# EAGLE board PCB 3.0.0 (EAGLE 6.5.0)
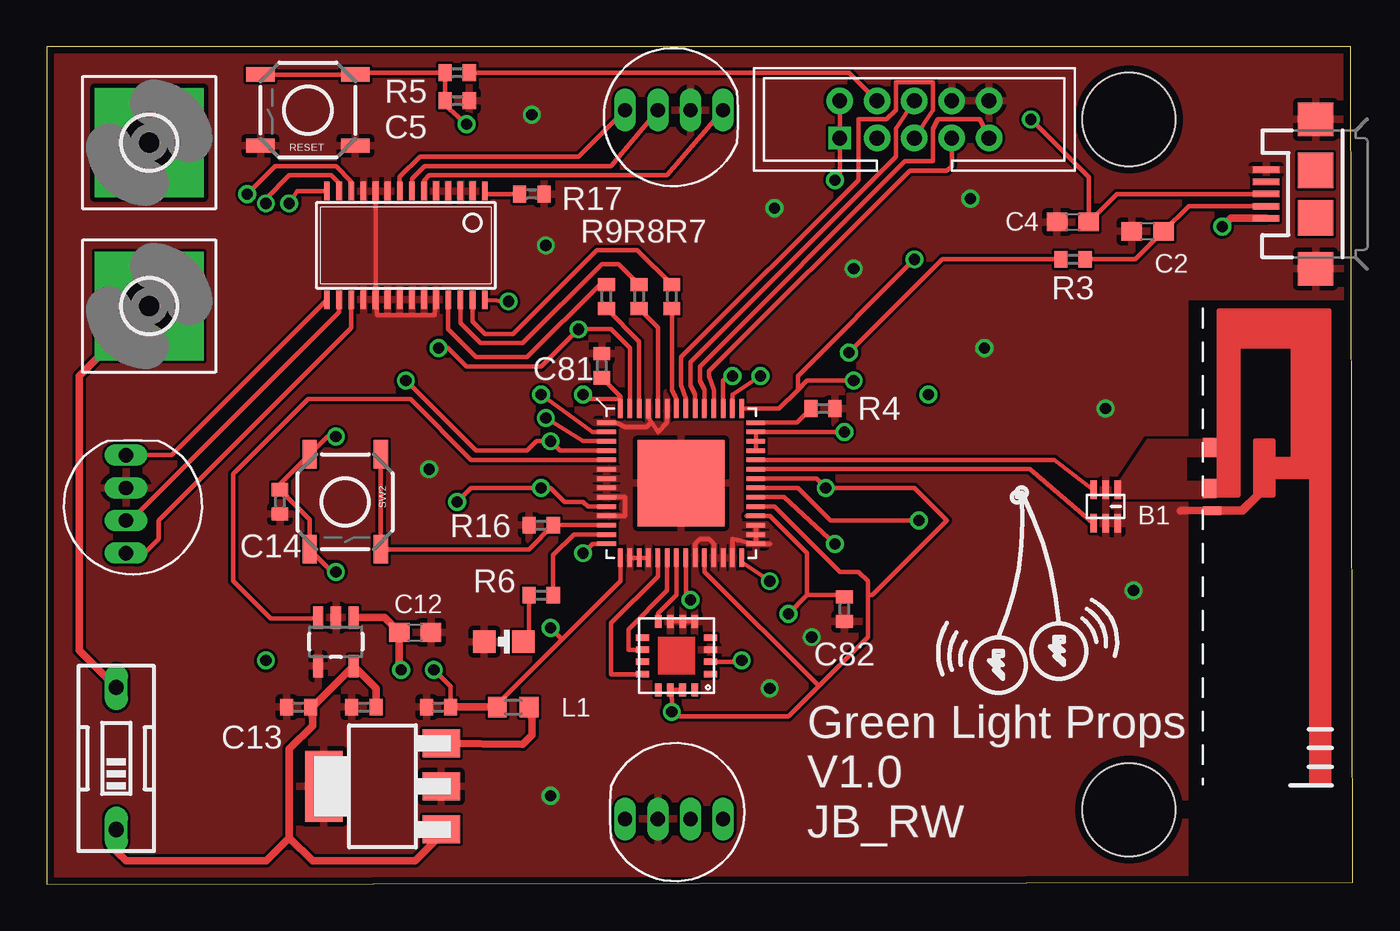
[diagram p0: board, top side]
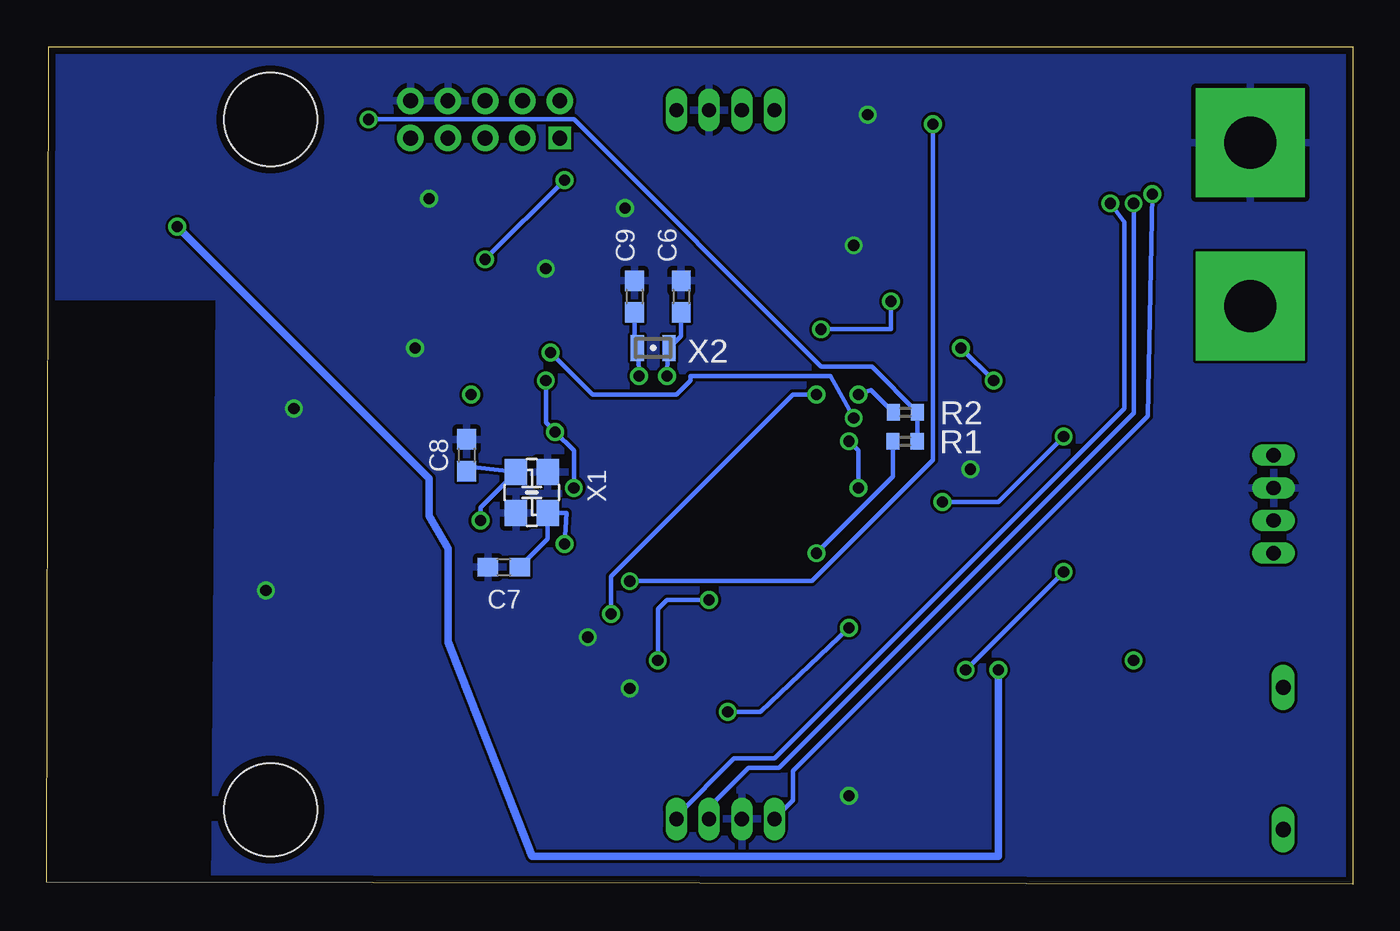
[diagram p1: board, bottom side, seen from below]

Size 70 x 44.9 mm. Coordinates in mm from the lower left corner, seen from the top.
Outline: 0,0 70,0.1 69.9,44.9 0,44.9 0,0
Copper layers (1*16): Top 0.0356mm / dielectric 1.5011mm / Bottom 0.0356mm
Design rules "LaenPCBOrder": minimum track width 6mil, minimum drill 13mil, track to track 6mil, track to pad 6mil, pad to pad 6mil, via to via 6mil, smd to smd 6mil, copper to edge 15mil, drill to drill 6mil, minimum pad ring 7mil, minimum via ring 7mil, stop-mask expansion 3mil, vias tented up to drill 0mil, thermal gap 10mil
Net classes: 0 default: width 0.152 mm, drill 0.305 mm, clearance 0.152 mm; 1 RF: width 0.152 mm, clearance 0.152 mm
Holes 5 mm at 58,4 58,41

## Footprints (pad centres in the part's own frame; a part is rotated, then mirrored left to right if it is on the bottom)
BALUN-0805 = smd 1 x 0.35: 1 -0.9,0.65; 2 -0.9,0; 3 -0.9,-0.65; 4 0.9,-0.65; 5 0.9,0; 6 0.9,0.65
C0402 = smd 0.7 x 0.9: 1 -0.65,0; 2 0.65,0
C0603 = smd 1.1 x 1: 1 -0.85,0; 2 0.85,0
LED-RGB-THRU = drill 0.762 pad 0.889 long: 1 1.75,0; 2 0,0; 3 -1.75,0; 4 -3.5,0
2,8-PAD-SQUARE = drill 2.8 pad 5.842 square: B2,8 0,0
USB-MICROB = smd 0.35 x 1.4: D+ 0,2.65; D- -0.65,2.65; GND 1.3,2.65; ID 0.65,2.65; VBUS -1.3,2.65 | smd 1.8 x 1.9: MT1 -4,0; MT2 4,0 | smd 1.9 x 1.9: P$1 -1.27,0; P$2 1.27,0
HDR-2X5-2.00 = drill 0.8 square: 1 -4,-1 | drill 0.8 pad 1.422: 2 -4,1; 3 -2,-1; 4 -2,1; 5 0,-1; 6 0,1; 7 2,-1; 8 2,1; 9 4,-1; 10 4,1
R603 = smd 1 x 1.1: 1 -0.85,0; 2 0.85,0
LED-805 = smd 1.2 x 1.2: A 0,-1.05; C 0,1.05
R0402 = smd 0.7 x 0.9: 1 -0.65,0; 2 0.65,0
TACTILE_SWITCH_SMD = smd 1.524 x 0.762: 1 -2.54,1.905; 2 2.54,1.905; 3 -2.54,-1.905; 4 2.54,-1.905
DIPSWITCH = drill 0.813 long: 1 -1.27,-3.81; 4 -1.27,3.81
QFN56 = smd 1 x 0.24: 1 -4,3.25; 2 -4,2.75; 3 -4,2.25; 4 -4,1.75; 5 -4,1.25; 6 -4,0.75; 7 -4,0.25; 8 -4,-0.25; 9 -4,-0.75; 10 -4,-1.25; 11 -4,-1.75; 12 -4,-2.25; 13 -4,-2.75; 14 -4,-3.25; 29 4,-3.25; 30 4,-2.75; 31 4,-2.25; 32 4,-1.75; 33 4,-1.25; 34 4,-0.75; 35 4,-0.25; 36 4,0.25; 37 4,0.75; 38 4,1.25; 39 4,1.75; 40 4,2.25; 41 4,2.75; 42 4,3.25 | smd 0.24 x 1: 15 -3.25,-4; 16 -2.75,-4; 17 -2.25,-4; 18 -1.75,-4; 19 -1.25,-4; 20 -0.75,-4; 21 -0.25,-4; 22 0.25,-4; 23 0.75,-4; 24 1.25,-4; 25 1.75,-4; 26 2.25,-4; 27 2.75,-4; 28 3.25,-4; 43 3.25,4; 44 2.75,4; 45 2.25,4; 46 1.75,4; 47 1.25,4; 48 0.75,4; 49 0.25,4; 50 -0.25,4; 51 -0.75,4; 52 -1.25,4; 53 -1.75,4; 54 -2.25,4; 55 -2.75,4; 56 -3.25,4 | smd 4.65 x 4.65: PAD 0,0
SOT23-5 = smd 0.55 x 1.2: 1 -0.95,-1.3; 2 0,-1.3; 3 0.95,-1.3; 4 0.95,1.3; 5 -0.95,1.3
DN007+0 = smd 0.46 x 1: FEED 2.22,-2.8 | smd 1.01 x 0.74: GND -1.16,-2.93; GND@1 1.035,-2.93
TSSOP28 = smd 0.305 x 0.991: 1 -4.225,-2.918; 2 -3.575,-2.918; 3 -2.925,-2.918; 4 -2.275,-2.918; 5 -1.625,-2.918; 6 -0.975,-2.918; 7 -0.325,-2.918; 8 0.325,-2.918; 9 0.975,-2.918; 10 1.625,-2.918; 11 2.275,-2.918; 12 2.925,-2.918; 13 3.575,-2.918; 14 4.225,-2.918; 15 4.225,2.918; 16 3.575,2.918; 17 2.925,2.918; 18 2.275,2.918; 19 1.625,2.918; 20 0.975,2.918; 21 0.325,2.918; 22 -0.325,2.918; 23 -0.975,2.918; 24 -1.625,2.918; 25 -2.275,2.918; 26 -2.925,2.918; 27 -3.575,2.918; 28 -4.225,2.918
16LCSP = smd 0.7 x 0.35: 1 -1.825,0.975; 2 -1.825,0.325; 3 -1.825,-0.325; 4 -1.825,-0.975; 9 1.825,-0.975; 10 1.825,-0.325; 11 1.825,0.325; 12 1.825,0.975 | smd 0.35 x 0.7: 5 -0.975,-1.85; 6 -0.35,-1.85; 7 0.325,-1.85; 8 0.975,-1.85; 13 0.975,1.825; 14 0.325,1.825; 15 -0.325,1.825; 16 -0.975,1.825
SOT223 = smd 1.5 x 2: 1 -2.3,-3.15; 2 0,-3.15; 3 2.3,-3.15 | smd 3.8 x 2: 4 0,3.15
XTAL-4-3225 = smd 1.4 x 1.2: 1 -1.1,-0.85; 2 1.1,-0.85; 3 1.1,0.85; 4 -1.1,0.85
FC-12M = smd 0.7 x 1.4: 1 -0.85,0; 2 0.85,0

## Placement (x,y rotation side)
B1  BALUN  [BALUN-0805]  56.75,20.25 270 top
C1  0u1  [C0402]  17,9.5 180 top
C2  47p  [C0603]  59,35 0 top
C3  0u1  [C0402]  21,9.5 0 top
C4  47p  [C0603]  55,35.5 0 top
C5  0.1u  [C0402]  22,42 180 top
C6  47p  [C0603]  36,31.5 270 bottom
C7  47p  [C0603]  45.5,17 0 bottom
C8  47p  [C0603]  47.5,23 270 bottom
C9  47p  [C0603]  38.5,31.5 270 bottom
C12  47p  [C0603]  19.75,13.5 0 top
C13  0u1  [C0402]  13.5,9.5 0 top
C14  0u1  [C0402]  12.5,20.5 270 top
C81  1u  [C0402]  29.75,27.8 270 top
C82  1u  [C0402]  42.75,14.75 90 top
D1  LED-RGB-CC-THRUDIFFUSE  [LED-RGB-THRU]  4.25,21.25 90 top
D2  LED-RGB-CC-THRUDIFFUSE  [LED-RGB-THRU]  32.75,3.5 180 top
D3  LED-RGB-CC-THRUDIFFUSE  [LED-RGB-THRU]  34.5,41.5 0 top
H1  MOUNT-PAD-SQUARE2.8  [2,8-PAD-SQUARE]  5.5,31 0 top
H2  MOUNT-PAD-SQUARE2.8  [2,8-PAD-SQUARE]  5.5,39.75 0 top
JP1  USB-MICROB  [USB-MICROB]  68,37 90 top
JTAG  JTAG10  [HDR-2X5-2.00]  46.5,41 0 top
L1  [R603]  25,9.5 180 top
LED2  [LED-805]  24.5,13 90 top
R1  1k5  [R0402]  24,23.75 180 bottom
R2  33  [R0402]  23.98,25.3 180 bottom
R3  33  [R0402]  55,33.5 180 top
R4  56k  [R0402]  41.6,25.5 0 top
R5  2k2  [R0402]  22,43.5 0 top
R6  470  [R0402]  26.5,15.5 0 top
R7  1.8k  [R0402]  33.5,31.5 270 top
R8  1.8k  [R0402]  31.75,31.5 270 top
R9  1.8k  [R0402]  30,31.5 270 top
R16  10k  [R0402]  26.5,19.25 180 top
R17  442  [R0402]  26,37 0 top
RESET  [TACTILE_SWITCH_SMD]  14,41.5 180 top
SW1  [DIPSWITCH]  5,6.75 0 top
SW2  [TACTILE_SWITCH_SMD]  16,20.5 270 top
U1  CC2538  [QFN56]  34,21.5 0 top
U2  MAX1555  [SOT23-5]  15.5,13 180 top
U$2  INVERTED_F_ANTENNA+0  [DN007+0]  65.25,22.25 270 top
U$3  TLC59116  [TSSOP28]  19.25,34.25 180 top
U$4  ADXL33X  [16LCSP]  33.75,12.25 180 top
VREG1  LM3940IMP  [SOT223]  18,5.25 90 top
X1  32MHz  [XTAL-4-3225]  44,21 90 bottom
X2  FC-12M  [FC-12M]  37.5,28.75 180 bottom

## Library data of the parts
B1 C1-C9 C12-C14 C81 C82 L1 LED2 X1 = discrete
D1-D3 = SparkFun-LED2; PROD_ID: DIO-09434
H1 H2 = holes
JP1 = SparkFun-Connectors; PROD_ID: CONN-09505
JTAG = jtag
R1-R9 R16 R17 = rcl
RESET SW2 = SparkFun-Electromechanical; PROD_ID: SWCH-08247
SW1 = SparkFun-Electromechanical
U1 = ic
U2 = SparkFun-PowerIC
U$2 = antenna
U$3 = tlc59116
U$4 = adafruit
VREG1 = voltage-regulators
X2 = crystal

## Nets
3V3: C3.2 C14.1 JTAG.1 JTAG.2 L1.2 SW2.3 SW2.4 U1.4 U1.10 U1.15 U1.24 U1.33 U1.36 U1.39 U1.40 U1.41 U1.43 U1.55 U$3.28 U$4.14 U$4.15
!RST: JTAG.4 R5.2
!RST_PIN: C5.2 R5.1 RESET.3 RESET.4 U1.28
ACCRESET: R9.2 U1.54
ACCSCL: R8.2 U1.52
ACCSDA: R7.2 U1.50
CN1: C4.2 JP1.D+ R1.1 R2.1
DCOUPL: C81.2 C82.2 U1.32 U1.56
GND: B1.2 B1.5 B1.6 C1.2 C2.1 C3.1 C4.1 C5.1 C6.1 C7.1 C8.1 C9.1 C12.2 C13.1 C14.2 C81.1 C82.1 D1.2 D2.2 D3.2 H2.B2,8 JP1.GND JP1.MT1 JP1.MT2 JTAG.8 JTAG.10 LED2.C R4.2 R16.2 R17.2 RESET.1 RESET.2 U1.1 U1.6 U1.7 U1.8 U1.9 U1.11 U1.16 U1.18 U1.23 U1.25 U1.26 U1.27 U1.29 U1.30 U1.31 U1.51 U1.53 U1.PAD U2.2 U2.4 U$2.FEED U$3.2 U$3.3 U$3.4 U$3.5 U$3.9 U$3.10 U$3.11 U$3.18 U$3.19 U$3.20 U$3.21 U$3.22 U$3.23 U$3.24 U$4.3 U$4.5 U$4.6 U$4.7 VREG1.2 VREG1.4 X1.2 X1.4
N$1: R2.2 U1.2
N$2: R3.2 U1.3
N$3: R16.1 SW2.1 SW2.2 U1.12
N$4: R1.2 U1.14
N$5: R4.1 U1.42
N$6: JTAG.9 U1.47
N$7: JTAG.7 U1.46
N$8: U1.21 U$4.8
N$9: U1.20 U$4.10
N$10: U1.19 U$4.12
N$11: C1.1 C13.2 SW1.1 U2.5 VREG1.1
N$12: C2.2 JP1.D- R3.1
N$13: H1.B2,8 SW1.4
N$14: D3.1 U$3.6
N$15: D3.3 U$3.7
N$16: U1.22 U$4.2
N$17: L1.1 VREG1.3
N$18: D3.4 U$3.8
N$19: R17.1 U$3.1
N$20: D1.1 U$3.15
N$21: U1.5 U2.3
N$22: D1.3 U$3.16
N$23: C6.2 U1.45 X2.1
N$24: D2.1 U$3.12
N$25: D1.4 U$3.17
N$26: D2.3 U$3.13
N$27: B1.3 U1.38
N$28: B1.4 U1.37
N$29: D2.4 U$3.14
N$30: C8.2 U1.35 X1.3
N$31: C7.2 U1.34 X1.1
N$40: C9.2 U1.44 X2.2
N$42: LED2.A R6.1
N$43: R6.2 U1.13
N$50: R7.1 U$3.27
N$51: R8.1 U$3.26
N$52: R9.1 U$3.25
PB6: JTAG.5 U1.49
PB7: JTAG.6 U1.48
RF: B1.1 U$2.GND U$2.GND@1
VBUS: C12.1 JP1.VBUS U2.1

## Tracks (layer width: path | path; a pad name or v marks a point on that pad's centre or on a via)
3V3  (via drill 0.6)
  Top 0.254: L1.2 24.15,9.65 27.62,13.12 | 27.62,13.12 30.75,16.25 U1.15 | JTAG.2 JTAG.1 42.5,38 v42.25,37.75 | 38,25.5 U1.43 39.25,25.5 40.25,26.5 | U$4.15 U$4.14 33.5,9.85 v33.5,9.25 33.75,9 39.75,9 41.38,10.62 | v46.5,33.5 40.25,27.25 40.25,26.5 | U1.39 U1.40 U1.41 v42.75,24.25 | U1.55 31.25,28.75 30.25,29.75 v28.5,29.75 26.5,27.75 22.5,27.75 21.5,28.75 v21,28.75 | v24.75,31.25 23.5,31.31 U$3.28 | C3.2 21.65,10.6 v20.75,11.5 | v15.5,16.75 15.3,16.75 SW2.4 14.1,19.55 C14.1 12.5,21.45 SW2.3 15.05,24 v15.5,24 | v27,13.75 27.62,13.12 | 40.25,26.5 40.75,27 v43.25,27 | U1.10 29,20.25 28.75,20.5 27.75,20.5 27,21.25 v26.5,21.25 22.75,21.25 v22,20.5 | U1.33 39,20.25 42.5,16.75 43.5,16.75 44,16.25 44,15.5 | 44,15.5 44,13.25 41.38,10.62 | U1.24 35.25,16.75 41.38,10.62 | U1.4 27.5,23.25 v27,23.75 26.25,23.75 25.75,23.25 23,23.25 v19.25,27 | U1.36 41.25,21.75 v41.75,21.25 46.5,21.25 48.25,19.5 44.25,15.5 44,15.5
  Top 0.406: L1.2 C3.2
  Bottom 0.254: v42.25,37.75 v46.5,33.5 | v28.5,29.75 24.75,29.75 v24.75,31.25 | v20.75,11.5 v15.5,16.75 | v33.5,9.25 31.75,9.25 v27,13.75 | v43.25,27 43.25,24.75 v42.75,24.25 41.75,23.25 v41.75,21.25 | v22,20.5 19,20.5 v15.5,24 | v27,23.75 26.5,23.25 v26.5,21.25 | v19.25,27 v21,28.75
!RST
  Top 0.254: JTAG.4 43,43.5 R5.2
!RST_PIN  (via drill 0.6)
  Top 0.254: 16.39,43.5 RESET.3 | RESET.3 RESET.4 | v22.5,40.75 21.35,41.75 C5.2 R5.1 16.64,43.5 RESET.3 | v38.75,16.25 37.25,17.25 U1.28
  Bottom 0.254: v22.5,40.75 22.5,22.75 29,16.25 v38.75,16.25
ACCRESET
  Top 0.254: U1.54 31.75,29.1 R9.2
ACCSCL
  Top 0.254: U1.52 32.75,29.85 R8.2
ACCSDA
  Top 0.254: U1.50 33.75,26 33.5,26.5 R7.2
CN1  (via drill 0.6)
  Top 0.254: JP1.D+ 57.35,37 C4.2 55.85,37.9 v52.75,41
  Bottom 0.254: v52.75,41 41.75,41 28.5,27.75 25.78,27.75 R2.1 23.33,24.5 R1.1
DCOUPL  (via drill 0.6)
  Top 0.254: 37.5,19.75 U1.32 38.75,19.75 40.75,17.75 40.75,15.5 | 40.75,15.5 42.65,15.5 C82.2 | 40.75,15.5 v39.75,14.5 | 30.75,26 30.75,26.15 C81.2 | U1.56 30.75,26 | 30.75,26 29,26 v28.75,26.25
  Bottom 0.254: v39.75,14.5 39.75,16.5 30,26.25 v28.75,26.25
GND  (via drill 0.6)
  Top 0.254: U1.31 U1.29 | U1.53 32.25,25 32.4,24.77 | 32.4,24.77 32.75,24.25 33.25,24.75 U1.51 | U1.27 36.75,18.5 U1.29 | U1.29 38.75,18.25 | U$3.24 20.79,30.5 17.71,30.5 U$3.19 U$3.10 | U$4.7 U$4.6 U$4.5 | U1.16 U1.18 | U1.9 31,20.75 31,19.75 U1.11 | U1.25 35.75,18.25 35.5,18.5 35,18.5 34.75,18.25 U1.23 | U1.1 30.5,24.75 31,24.5 32.13,24.5 32.4,24.77
  Top 0.406: U$2.FEED 60.78,20.03 60.75,20
  other vias: 50.25,28.75 20.5,22.25 56.75,25.5 58.25,15.75 26,41.25 26.75,34.25 39,36.25 27,4.75 41,13.25 38.75,10.5 49.5,36.75 43.25,33
  pour Top (rank 5): -0.5,45.5 70.5,45.5 70.5,31.5 61,31.5 61,-1 -0.5,-1
  pour Bottom (rank 4): -0.5,45 70,45 70,31.5 60.75,31.5 61,-0.5 -0.5,-0.5
N$1  (via drill 0.6)
  Top 0.254: U1.2 29.25,24.25 v26.5,26.25
  Bottom 0.254: v26.5,26.25 25.83,26.5 R2.2
N$2  (via drill 0.6)
  Top 0.254: R3.2 48,33.5 v43,28.5 | v26.75,25 28.75,23.75 U1.3
  Bottom 0.254: v43,28.5 40.75,26.25 36.25,26.25 35.5,27 35.5,27.25 28,27.25 v26.75,25
N$3
  Top 0.254: SW2.1 SW2.2 25.86,17.96 R16.1 U1.12
N$4  (via drill 0.6)
  Top 0.254: v28.75,17.75 29.25,18.25 U1.14
  Bottom 0.254: R1.2 24.65,21.85 v28.75,17.75
N$5
  Top 0.254: R4.1 40.2,24.75 U1.42
N$6
  Top 0.254: JTAG.9 50,41 47.75,41 47.5,40.5 47.5,38.75 46,38.75 35,27.75 35,27 35.25,26.5 U1.47
N$7
  Top 0.254: U1.46 35.75,26.5 35.5,27.25 35.5,27.5 46.25,38.25 48.25,38.25 48.5,38.5 JTAG.7
N$8
  Top 0.254: U$4.8 32.77,14.53 33.75,15.5 U1.21
N$9
  Top 0.254: U$4.10 31.18,12.57 31.18,13.68 33.25,15.75 U1.20
N$10
  Top 0.254: U$4.12 31.9,11.25 30.25,11.25 30.25,14 32.75,16.5 U1.19
N$11
  Top 0.406: C1.1 17.65,10.5 U2.5 14.25,9.5 14.25,8.9 | VREG1.1 21.15,2.65 19.75,1.25 14.25,1.25 13,2.5 | 13,2.5 13,7.25 14.25,8.5 14.25,8.9 | 14.25,8.9 C13.2 | SW1.1 3.73,1.77 4.25,1.25 11.75,1.25 13,2.5
N$12
  Top 0.254: JP1.D- 61.2,36.35 C2.2 58.35,33.5 R3.1
N$13
  Top 0.406: H1.B2,8 1.75,27.25 1.75,12.54 SW1.4
N$14
  Top 0.254: D3.1 33.25,38 20.5,38 20.23,37.73 U$3.6
N$15
  Top 0.254: D3.3 30.25,38.5 20.25,38.5 19.57,37.83 U$3.7
N$16  (via drill 0.6)
  Top 0.254: U$4.2 37.17,11.93 v37.25,12 | v34.5,15.25 34.25,15.5 U1.22
  Bottom 0.254: v37.25,12 37.25,14.75 36.75,15.25 v34.5,15.25
N$17
  Top 0.406: VREG1.3 25.5,7.5 26,8 26,8.85 L1.1
N$18
  Top 0.254: D3.4 28.5,39 20,39 18.93,37.92 U$3.8
N$19
  Top 0.254: U$3.1 23.64,37 R17.1
N$20
  Top 0.254: U$3.15 6.69,23 D1.1
N$21
  Top 0.254: U1.5 22.75,22.75 19.5,26 14,26 10,22 10,16.25 12,14.25 14.5,14.25 U2.3
N$22
  Top 0.254: U$3.16 15.68,30.68 7.12,22.12 6.75,21.75 4.5,19.5 D1.3
N$23  (via drill 0.6)
  Top 0.254: v36.75,27.25 36.25,27 U1.45
  Bottom 0.254: v36.75,27.25 36.75,27.65 X2.1 36,29.4 C6.2 36,30.75
N$24  (via drill 0.6)
  Top 0.254: v10.75,37 12.25,38.5 15.5,38.5 16.32,37.67 U$3.12
  Bottom 0.254: v10.75,37 11,25.09 30,6.09 30,4.5 D2.1
N$25
  Top 0.254: U$3.17 16.32,29.82 6,19.5 6,18.5 5.25,17.75 D1.4
N$26  (via drill 0.6)
  Top 0.254: v11.75,36.5 11.75,36.75 13,38 15.25,38 15.68,37.58 U$3.13
  Bottom 0.254: v11.75,36.5 11.75,25.25 30.75,6.25 32.38,6.25 34.5,4.13 D2.3
N$27
  Top 0.254: B1.3 54,22.75 U1.38
N$28
  Top 0.254: B1.4 52.7,22.25 U1.37
N$29  (via drill 0.6)
  Top 0.254: v13,36.5 13.42,37.17 U$3.14
  Bottom 0.254: v13,36.5 12.25,35.5 12.25,25.5 31,6.75 33.16,6.75 36.25,3.65 D2.4
N$30  (via drill 0.6)
  Top 0.254: v46.75,19.5 42,19.5 40.25,21.25 U1.35
  Bottom 0.254: C8.2 46.95,22.35 X1.3 46.75,20.2 v46.75,19.5
N$31  (via drill 0.6)
  Top 0.254: v42.25,18.25 39.5,20.75 U1.34
  Bottom 0.254: C7.2 43.15,18.5 X1.1 42.15,19.9 v42.25,18.25
N$39  (via drill 0.6)
  other vias: 47.25,26.25
N$40  (via drill 0.6)
  Top 0.254: U1.44 36.75,26.25 v38.25,27.25
  Bottom 0.254: v38.25,27.25 38.25,27.65 X2.2 38.5,28.9 C9.2
N$42
  Top 0.254: LED2.A 25.85,13.3 R6.1
N$43
  Top 0.254: R6.2 27.15,17.65 28.25,18.75 U1.13
N$46  (via drill 0.6)
  other vias: 11.75,12
N$50
  Top 0.254: U$3.27 22.82,30.18 23.5,29.5 25,29.5 29.5,34 31.65,34 R7.1
N$51
  Top 0.254: U$3.26 22.18,30.07 23.25,29 25.5,29 29.75,33.25 30.65,33.25 R8.1
N$52
  Top 0.254: R9.1 29.65,32.15 25.75,28.25 23,28.25 21.5,29.75 21.5,31.31 U$3.25
PB6
  Top 0.254: U1.49 34.25,26 34,26.75 34,28.25 43.5,37.75 43.5,41 45,41 45.5,41.5 45.5,43 47.5,43 47.5,41.5 JTAG.5
PB7
  Top 0.254: U1.48 34.75,26.25 34.5,26.75 34.5,28 45.5,39 45.5,40.5 JTAG.6
RF
  pour Top (no thermals): 62,20.75 57.5,20.75 57.5,21.5 59,23.75 62,23.75 62,23 61,23 61,21.5 62,21.5
VBUS  (via drill 0.6)
  Top 0.406: U2.1 18.1,14.3 C12.1 18.9,11.6 v19,11.5 | v63,35.25 63.45,35.7 JP1.VBUS
  Bottom 0.406: v19,11.5 19,1.5 44,1.5 48.5,13 48.5,18 49.5,19.75 49.5,21.75 v63,35.25

## Text on the board
tNames: Green Light Props / V1.0 / JB_RW